# Altium PCB EconetTerminator.PcbDoc
Units mm, origin at the board's own origin, x right, y up, seen from the top; angles counter-clockwise.
Board outline 6.86 x 6.93 mm, 2 copper layers (Top Layer, Bottom Layer); 11 components, 6 nets, 17 pads, 0 vias.
Unrouted connection lines stored in the file: 1.
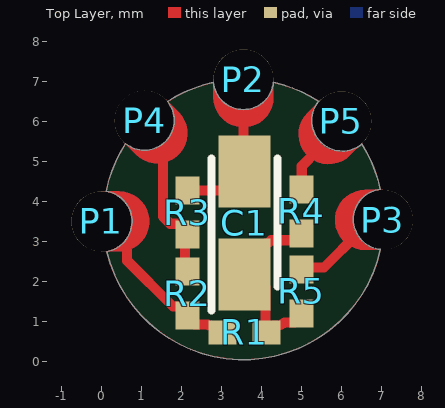
[diagram p0: Top Layer view]
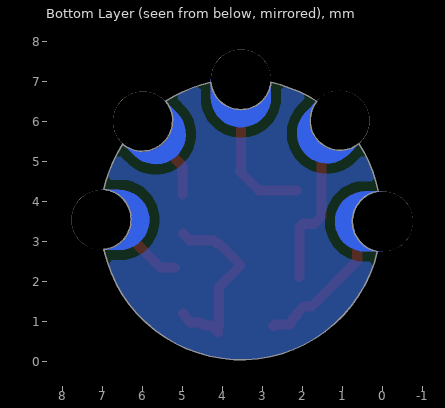
[diagram p1: Bottom Layer view, seen from below]

## Layer stack, top to bottom
Top Solder: solder mask 0.0102, Solder Resist, Dk 3.5
Top Layer: signal copper 0.0356
Dielectric 1: dielectric 0.32, FR-4, Dk 4.8
Bottom Layer: signal copper 0.0356
Bottom Solder: solder mask 0.0102, Solder Resist, Dk 3.5

## Board outline
0.137,2.747 ccw(c0,3.5) 0.116,4.257 0.115,4.252 cw(c3.55,3.55) 0.602,5.449 ccw(c1.075,6.025) 1.651,6.498 cw(c3.55,3.55) 2.8,6.975 ccw(c3.55,7.05) 4.3,6.975 cw(c3.55,3.55) 5.431,6.509 ccw(c6.025,6.025) 6.51,5.431 6.505,5.437 cw(c3.55,3.55) 6.975,4.3 ccw(c7.05,3.55) 6.975,2.8 cw(c3.55,3.55)

## Design rules (kind name [scope] priority, off if disabled: settings)
Clearance [All] p1: gap=0.254 ignorepadtopadclearanceinfootprint=FALSE except(0: Arc-Hole Track-Hole SMDPad-Hole THPad-Hole Via-Hole Fill-Hole Poly-Hole Region-Hole Text-Hole)
PolygonConnect [All] p1: connectstyle=Relief reliefconductorwidth=0.254 reliefentries=4 polygonreliefangle="90 Angle" airgapwidth=0.254
RoomDefinition EconetTerminator [InComponentClass('EconetTerminator')] p1: confinementstyle=ConfineIn formatcopy=TRUE lockcomponents=FALSE outline 9.375,9.125 11.175,9.125 11.175,9.95 9.375,9.95
RoutingVias [All] p1: holewidth=0.711 width=1.27 viastyle="Through Hole" minholewidth=0.711 minwidth=1.27 maxholewidth=0.711 maxwidth=1.27
SolderMaskExpansion [All] p1: expansion=0.102 istentingtop=FALSE
Width [All] p1: maxlimit=0.254 minlimit=0.254 preferedwidth=0.254
30 further rules are at their usual default settings.

## Components (designator, comment, footprint, x,y, rotation, side; value= is the part's Value field where it differs from the comment)
C1 "TAJA106K016RNJ" CAPPM3216X180N 3.575,3.475 r90 top
P1 "Edge_Pad" CONS_PAD 0,3.5 r270 top locked
P2 "Edge_Pad" CONS_PAD 3.55,7.05 r180 top locked
P3 "Edge_Pad" CONS_PAD 7.037,3.537 r90 top locked
P4 "Edge_Pad" CONS_PAD 1.081,6.018 r225 top locked
P5 "Edge_Pad" CONS_PAD 6,6 r135 top locked
R1 "0402WGF1001TCE" RESC1005X40N 3.575,0.725 r0 top
R2 "RC0402FR-07220RL" RESC1005X40N 2.15,1.7 r270 top
R3 "0402WGF1001TCE" RESC1005X40N 2.15,3.725 r270 top
R4 "RC0402FR-0756R2L" RESC1005X40N 5,3.75 r270 top
R5 "RC0402FR-0756R2L" RESC1005X40N 5,1.75 r270 top

## Footprints (in the part's own frame and the unit in brackets; to place one, negate y for a bottom-side part, rotate by r counter-clockwise, add the part's x,y. Pads: shape width x height; smd on the part's side, far side on the other; paste and mask are expansions set on the pad)
CAPPM3216X180N [mm]
  rect 1.8x1.3 smd: 1(-1.3,0) 2(1.275,0)
  silkscreen extent -2.2,-0.82 1.6,0.82, body extent -1.6,-0.82 1.6,0.82, height 1.8
CONS_PAD [mm]
  round 1.5 hole 1.5: 1(0,0)
  Multi-Layer region: -0.75,0 -0.75,0.449 -0.676,0.774 -0.468,1.035 -0.167,1.18 0.167,1.18 0.468,1.035 0.676,0.774 0.75,0.449 0.75,0.449 0.75,0
RESC1005X40N [mm]
  rect 0.7x0.6 smd: 1(-0.55,0) 2(0.55,0)
  body extent -0.5,-0.25 0.5,0.25, height 0.4

## Part data
C1: "10uF Tantalum", Manufacturer_Name=AVX, Mouser Part Number=581-TAJA106K016R, Arrow Part Number=TAJA106K016RNJ, Arrow Price/Stock=https://www.arrow.com/en/products/taja106k016rnj/avx, Datasheet Link=http://www.farnell.com/datasheets/1680476.pdf, Height=1.8mm, Manufacturer_Part_Number=TAJA106K016RNJ, Mouser Price/Stock=https://www.mouser.co.uk/ProductDetail/AVX/TAJA106K016RNJ?qs=OVpPYgiJXXV05Cvf2fCYWQ%3D%3D
P1 P2 P3 P4 P5: "Edge Pad"
R1 R3: "Resistor 1K", Manufacturer_Name="UNI-ROYAL(Uniroyal Elec)", Datasheet Link=https://datasheet.lcsc.com/szlcsc/Uniroyal-Elec-0402WGF1001TCE_C11702.pdf, Height=0.4mm, Manufacturer_Part_Number=0402WGF1001TCE
R2: "Resistor 220R", Manufacturer_Name=KEMET, Mouser Part Number=603-RC0402FR-07220RL, Arrow Part Number=RC0402FR-07220RL, Arrow Price/Stock=https://www.arrow.com/en/products/rc0402fr-07220rl/yageo?region=nac, Datasheet Link=https://datasheet.datasheetarchive.com/originals/distributors/Datasheets_SAMA/902f9e387b938f871d31120f5fc1d65e.pdf, Height=0.4mm, Manufacturer_Part_Number=RC0402FR-07220RL, Mouser Price/Stock=https://www.mouser.co.uk/ProductDetail/YAGEO/RC0402FR-07220RL?qs=UOUeRUa%252B8Wkw9iNOZEwgHw%3D%3D
R4 R5: "Resistor 56R2", Manufacturer_Name=KEMET, Datasheet Link=https://datasheet.datasheetarchive.com/originals/distributors/Datasheets_SAMA/902f9e387b938f871d31120f5fc1d65e.pdf, Height=0.4mm, Manufacturer_Part_Number=RC0402FR-0756R2L

## Nets (pads, with @x,y where several pads share a name; then routed paths per layer and width w, separated by ;. In a path a pad name is that pad's centre, name@x,y a point inside that pad or via, vN(x,y) a via of type N, cw(c..) or ccw(c..) an arc to the next point about the centre after c; other vN are vias at no path point)
NetC1_1: C1.1 R1.2 R4.2 R5.2 | length 4.8
  Top Layer w0.254: R5.2 4.827,0.977 4.574,0.977 cw(c4.383,1.168) 4.383,0.898 4.298,0.898 R1.2 4.125,0.894 4.102,0.894 4.098,0.898 4.098,1.864 3.575,2.387 3.575,2.425 4.098,2.948 4.164,2.948 4.247,3.031 4.831,3.031 R4.2
NetC1_2: C1.2 P2.1 R3.1 | length 2.7
  Top Layer w0.254: R3.1 3.1,4.275 C1.2 3.55,4.775 3.55,5.851
NetP1_1: P1.1 R1.1 R2.2 | length 3.2
  Top Layer w0.254: P1.1 P1.1@0.158,3.5 ; 0.643,2.776 0.643,2.518 1.788,1.373 1.977,1.373 2.15,1.2 R2.2 ; R2.2@2.223,1.102 2.323,0.927 2.661,0.921 ccw(c2.803,1.132) R1.1@2.753,0.883
NetP3_1: P3.1 R5.1 | length 1.9
  Top Layer w0.254: R5.1@5.198,2.348 5.564,2.348 6.432,3.216 P3.1@6.432,3.545 ; P3.1 P3.1@7.05,3.55
NetP4_1: P4.1 R2.1 R3.2 | length 3.5
  Top Layer w0.254: P4.1@1.075,6.025 P4.1 ; 1.45,5.15 1.535,5.065 1.535,3.626 1.717,3.443 2.002,3.443 R3.2@2.075,3.37 ; R3.2@2.075,3.313 R3.2@2.075,3.37 ; R2.1@2.1,2.112 2.088,2.124 2.088,3.358 R3.2@2.075,3.37
NetP5_1: P5.1 R4.1 | length 1.3
  Top Layer w0.254: R4.1@5.009,4.171 5.009,4.884 5.4,5.275 ; P5.1 P5.1@6.025,6.025

## Polygon pours and split planes (outlines as drawn)
no net on Bottom Layer "NONET_L02_P002" (solid, pour order 2): 0.137,2.747 ccw(c0,3.5) 0.116,4.257 0.115,4.252 cw(c3.55,3.55) 0.602,5.449 ccw(c1.075,6.025) 1.651,6.498 cw(c3.55,3.55) 2.8,6.975 ccw(c3.55,7.05) 4.3,6.975 cw(c3.55,3.55) 5.431,6.509 ccw(c6.025,6.025) 6.51,5.431 6.505,5.437 cw(c3.55,3.55) 6.975,4.3 ccw(c7.05,3.55) 6.975,2.8 cw(c3.55,3.55)
NetC1_1 on Top Layer "NETC1_1_L01_P001" (solid, remove dead copper, pour order 1): 0.137,2.747 ccw(c0,3.5) 0.116,4.257 0.115,4.252 cw(c3.55,3.55) 0.602,5.449 ccw(c1.075,6.025) 1.651,6.498 cw(c3.55,3.55) 2.8,6.975 ccw(c3.55,7.05) 4.3,6.975 cw(c3.55,3.55) 5.431,6.509 ccw(c6.025,6.025) 6.51,5.431 6.505,5.437 cw(c3.55,3.55) 6.975,4.3 ccw(c7.05,3.55) 6.975,2.8 cw(c3.55,3.55)

## Silkscreen, mask and mechanical layers (free items; w line width, h text height)
Mechanical 4:
  circle w0.05: c3.55,3.55 r3.506
Outline:
  lines w0.05: 0.115,4.252 cw(c3.55,3.55) 0.602,5.449 ccw(c1.075,6.025) 1.651,6.498 cw(c3.55,3.55) 2.8,6.975 ccw(c3.55,7.05) 4.3,6.975 cw(c3.55,3.55) 5.431,6.509 ccw(c6.025,6.025) 6.51,5.431 ; 0.116,4.257 cw(c0,3.5) 0.137,2.747 ccw(c3.55,3.55) 6.975,2.8 cw(c7.05,3.55) 6.975,4.3 ccw(c3.55,3.55) 6.505,5.437